# Altium PCB LightLinkV2.PcbDoc (part 2 of 2)
Units mil, origin at the board's own origin, x right, y up, seen from the top; angles counter-clockwise.
Board outline 15795 x 10265 mil, 4 copper layers (Top Layer, VCC, GND, Bottom Layer), stack 23.756 mil thick; 269 components, 206 nets, 809 pads, 14 vias.
Unrouted connection lines stored in the file: 511.
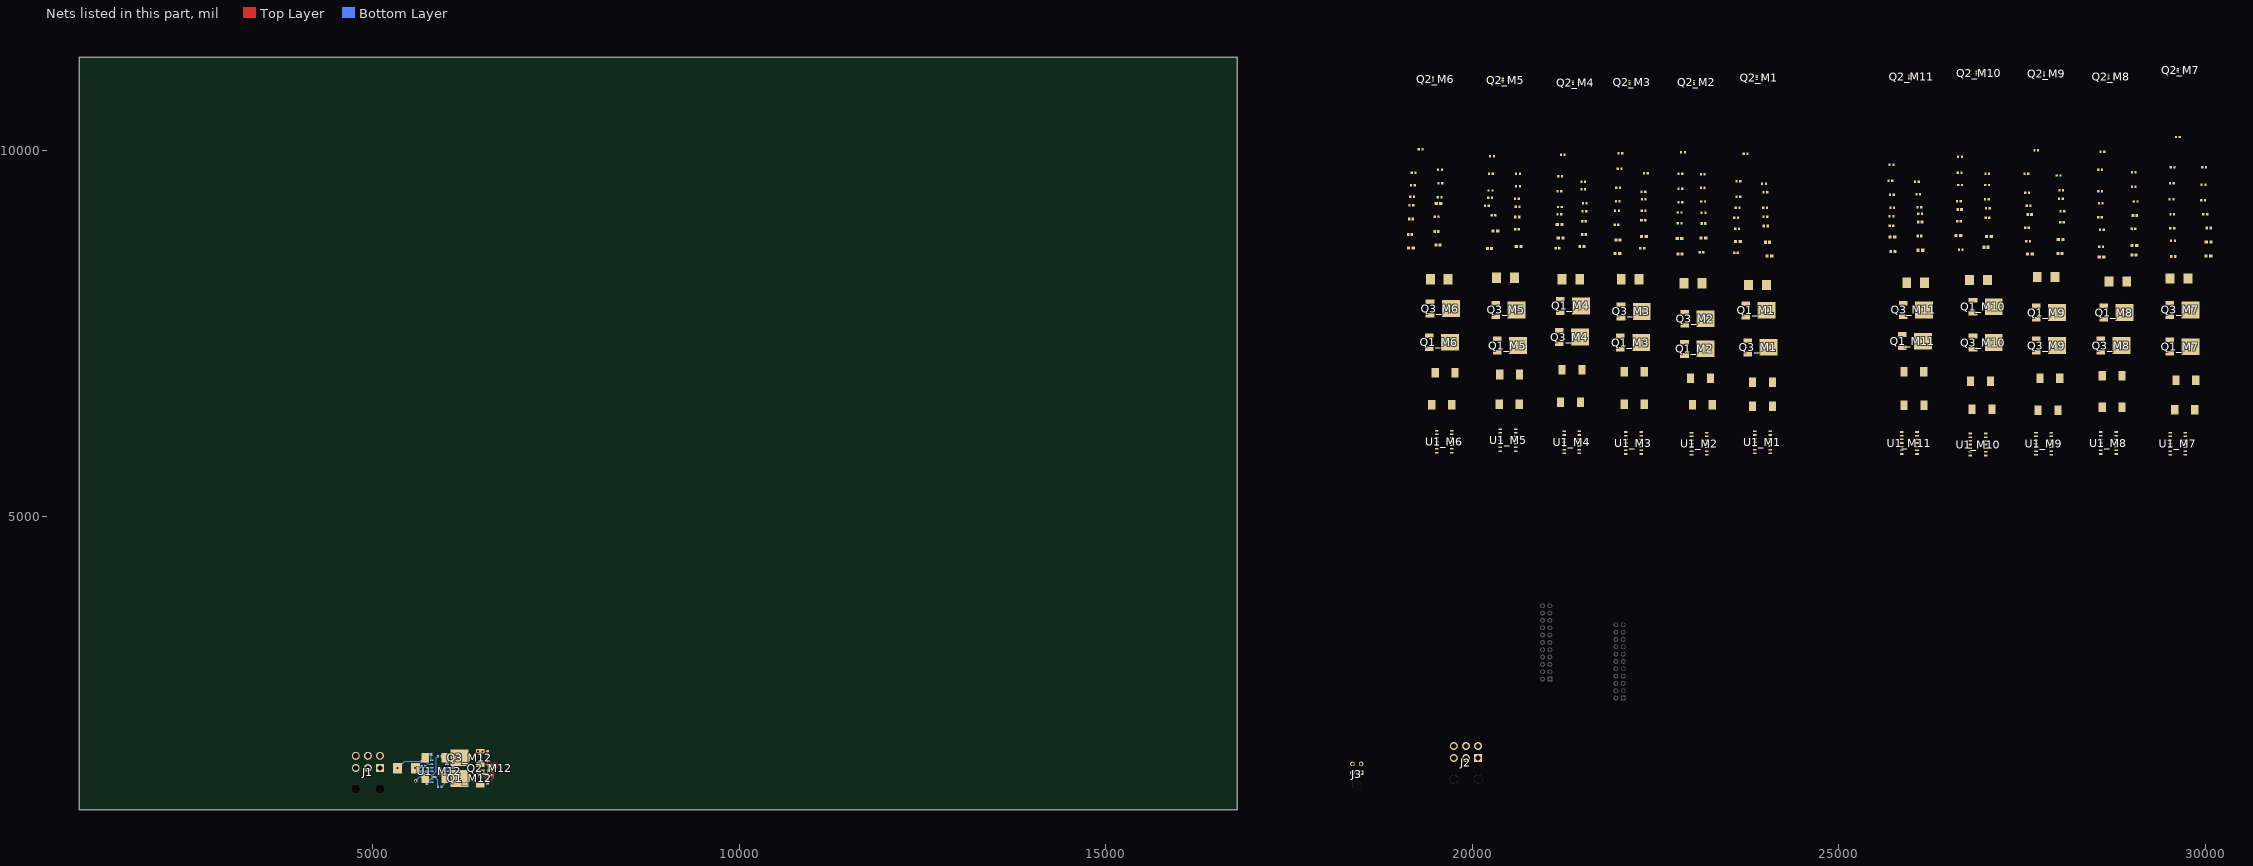
[diagram p4: the nets of this part, all layers, seen from the top]

## Part data
D1_M1 D1_M2 D1_M3 D1_M4 D1_M5 D1_M6 D1_M7 D1_M8 D1_M9 D1_M10 D1_M11 D1_M12 D2_M1 D2_M2 D2_M3 D2_M4 D2_M5 D2_M6 D2_M7 D2_M8 D2_M9 D2_M10 D2_M11 D2_M12: library part CMP-2000-07025-2, "DIODE GEN PURP 100V 5A SMC", Capacitance=40pF, Forward Current=5A, Manufacturer="Diodes Inc.", Max Junction Temp=+150°C, Max Repetitive Reverse Voltage=100V, Max Surge Forward Current=100A, Package=SMC, Peak Reverse Current=10uA, Temperature="-65°C to +150°C", Temperature Range Low=-65°C, Automotive=No, Category=Diode, ComponentLink2Description=Datasheet, ComponentLink2URL=https://www.diodes.com/assets/Datasheets/ds16007.pdf, Device Class L1="Discrete Semiconductors", Device Class L2=Diodes, Device Class L3="Rectifier Diodes", Digikey Description="DIODE GEN PURP 100V 5A SMC", Footprint Url=https://www.diodes.com/assets/Package-Files/SMC.pdf, Height=2.5mm, Lead Free=Yes, Manufacturer Part Number=S5BC-13-F, Mouser Description="Rectifiers 100V 5A", Octopart=https://octopart.com/s5bc-13-f-diodes+inc.-333396, Reverse Voltage=100V, RoHS=TRUE, Standoff Height=0.1mm, Temperature Range High=+150°C
J1 J2: library part CMP-04776-000024-1, "CONN HEADER R/A 6POS 4.2MM", Current Rating=8A, Manufacturer=Molex, Package=0, Temperature="-40°C to +105°C", Temperature Range High=+105°C, Temperature Range Low=-40°C, Voltage Rating=600V, Automotive=No, Category=Conn, ComponentLink2Description=Datasheet, ComponentLink2URL=https://www.molex.com/webdocs/datasheets/pdf/en-us/0455580003_PCB_HEADERS.pdf, Conn Gender=Male, Conn Orientation="Right Angle", Contact Material=Tin,Nickel, Device Class L1=Connectors, Device Class L2="Headers and Wire Housings", Device Class L3=unset, Digikey Description="CONN HEADER R/A 6POS 4.2MM", Footprint Url=https://www.molex.com/pdm_docs/sd/455580003_sd.pdf, Height=10.38mm, Lead Free=Yes, Manufacturer Part Number=455580003, Mouser Description="Conn Power HDR 6 POS 4.2mm Solder ST Thru-Hole 6 Terminal 1 Port Mini-Fit Jr™ Tray", Number Of Contacts=6, Number Of Rows=2, Octopart=https://octopart.com/45558-0003-molex-7672845, Pitch=4.2mm, RoHS=TRUE, Standoff Height=0.4mm
J3: library part CMP-04776-000002-1, "CONN HEADER R/A 4POS 3MM", Current Rating=8.5A, Manufacturer=Molex, Temperature="-40°C to +105°C", Temperature Range High=+105°C, Temperature Range Low=-40°C, Voltage Rating=600V, Automotive=No, Category=Conn, ComponentLink2Description=Datasheet, ComponentLink2URL=https://www.molex.com/webdocs/datasheets/pdf/en-us/0430450400_PCB_HEADERS.pdf, Conn Gender=Male, Conn Orientation="Right Angle", Contact Material=Tin,Nickel, Device Class L1=Connectors, Device Class L2="Headers and Wire Housings", Device Class L3=unset, Digikey Description="CONN HEADER R/A 4POS 3MM", Footprint Url=https://www.molex.com/pdm_docs/sd/430450400_sd.pdf, Height=9.27mm, Is Female=yes, Lead Free=Yes, Manufacturer Part Number=43045-0400, Number Of Contacts=4, Number Of Rows=2, Octopart=https://octopart.com/43045-0400-molex-287063, Package=43045-0400, Pitch=3mm, RoHS=TRUE
J4 J5: library part CMP-1502-01108-1, "THT Vertical Pin Header WR-PHD, Pitch 2.54 mm, Dual Row, 22 pins", Contact Resistance=20mOhm, Manufacturer="Wurth Elektronik", Operating Temperature=-40to105degC, Rated Current=3A, Withstanding Voltage=500VAC, Working Voltage=250VAC, Datasheet URL=https://katalog.we-online.de/em/datasheet/6130xx21121.pdf, Gender=Male, Manufacturer URL=http://www.we-online.de, Mounting Technology=THT, Orientation=Vertical, Package Reference=61302221121, Packaging=Bag, Part Number=61302221121, Pin Number=22, Pitch=2.54mm, Publisher=WurthElektronik, Row Number=Dual
Q1_M1 Q1_M2 Q1_M3 Q1_M4 Q1_M5 Q1_M6 Q1_M7 Q1_M8 Q1_M9 Q1_M10 Q1_M11 Q1_M12 Q3_M1 Q3_M2 Q3_M3 Q3_M4 Q3_M5 Q3_M6 Q3_M7 Q3_M8 Q3_M9 Q3_M10 Q3_M11 Q3_M12: library part CMP-1058-00409-1, "Power MOSFET, -25 A, -30 V, Logic Level P-Channel, 3-Pin DPAK, Pb-Free, Tape and Reel", Manufacturer="On Semiconductor", Package Type=DPAK-3, Channel Polarity="P Channel", Ciss Typ (pF)=900, ComponentLink1Description="Manufacturer URL", ComponentLink1URL=http://www.onsemi.com/, ComponentLink2Description=Datasheet, ComponentLink2URL=http://www.onsemi.cn/pub_link/Collateral/NTD25P03L-D.PDF, ComponentLink3Description="Package Specification", ComponentLink3URL=http://www.onsemi.cn/pub_link/Collateral/369C.PDF, Configuration=Single, Coss Typ (pF)=290, Crss Typ (pF)=105, DatasheetVersion="Rev. 4", ID Max (A)=25, Mounting Technology="Surface Mount", PackageDescription="3-Pin Flange Mount, Body 6.54 x 6.095 mm, Pitch 2.29 mm", PackageReference=DPAK-3-369C-01, PackageVersion="Rev. E, 02/2014", Packing="Tape and Reel", PartNumber=NTD25P03LT4G, PD Max (W)=75, Qrr Typ (nC)=35, RoHS=Pb-Free, V(BR)DSS Min (V)=30, VGS Max (V)=15, VGS(th) Max (V)=2
Q2_M1 Q2_M2 Q2_M3 Q2_M4 Q2_M5 Q2_M6 Q2_M7 Q2_M8 Q2_M9 Q2_M10 Q2_M11 Q2_M12: library part CMP-35916-000009-1, "MOSFET 2N-CH 60V 0.3A", Continuous Drain Current (ID)=300mA, Drain to Source Voltage (Vdss)=60V, Input Capacitance=40pF, Max Power Dissipation=285mW, FET Type="2 N-Channel", Mount="Surface Mount", Packaging="Tape and Reel", Rds On Max=1.5R
R1_M1 R1_M2 R1_M3 R1_M4 R1_M5 R1_M6 R1_M7 R1_M8 R1_M9 R1_M10 R1_M11 R1_M12 R9_M1 R9_M2 R9_M3 R9_M4 R9_M5 R9_M6 R9_M7 R9_M8 R9_M9 R9_M10 R9_M11 R9_M12: library part CMP-2000-03352-2, "RES Thick Film, 43kΩ, 1%, 0.1W, 100ppm/°C, 0603", Case Code (Imperial)=0603, Case Code (Metric)=1608, Max Operating Temperature=155°C, Max Power Dissipation=100mW, Min Operating Temperature=-55°C, Package Quantity=10, Resistance=43kR, Temperature Coefficient=100ppm/°C, Tolerance=1%, Voltage Rating=75V, Case/Package=0603, Composition="Thick Film", Contact Plating=Tin, Depth=0.85mm, Features="Automotive AEC-Q200", Height=0.45mm, Lead Free="Lead Free", Length=1.55mm, Military Standard=Not, Mount="Surface Mount", Number of Pins=2, Number of Terminations=2, Packaging="Tape and Reel", Power Rating=100mW, Radiation Hardening=No, Termination=SMD/SMT, Voltage Rating (DC)=75V, Weight=7.1E-05oz, Width=0.033inch
R2_M1 R2_M2 R2_M3 R2_M4 R2_M5 R2_M6 R2_M7 R2_M8 R2_M9 R2_M10 R2_M11 R2_M12 R5_M1 R5_M2 R5_M3 R5_M4 R5_M5 R5_M6 R5_M7 R5_M8 R5_M9 R5_M10 R5_M11 R5_M12: library part CMP-2000-00873-2, "RES SMD 1K OHM 0.1% 1/10W 0603", Case Code (Imperial)=0603, Case Code (Metric)=1608, Max Operating Temperature=155°C, Max Power Dissipation=100mW, Min Operating Temperature=-55°C, Package Quantity=5000, Resistance=1kR, Resistance Tolerance=0.1%, Resistor Type="Thin Film", Temperature Coefficient=25ppm/°C, Voltage Rating=75V, Case/Package=0603, Construction=Rectangular, Contact Plating=Tin, Depth=0.8mm, Height=0.45mm, Length=1.6mm, Military Standard=Not, Mount="Surface Mount", Number of Pins=2, Number of Terminations=2, Packaging="Tape and Reel", Power Rating=100mW, Radiation Hardening=No, REACH SVHC="No SVHC", RoHS Compliant=Yes, Series=ERA-3A, Size Code=0603, Technology="METAL FILM", Termination=SMD/SMT, Tolerance=0.1%, Width=0.8mm
R3_M1 R3_M2 R3_M3 R3_M4 R3_M5 R3_M6 R3_M7 R3_M8 R3_M9 R3_M10 R3_M11 R3_M12 R4_M1 R4_M2 R4_M3 R4_M4 R4_M5 R4_M6 R4_M7 R4_M8 R4_M9 R4_M10 R4_M11 R4_M12 R6_M1 R6_M2 R6_M3 R6_M4 R6_M5 R6_M6 R6_M7 R6_M8 R6_M9 R6_M10 R6_M11 R6_M12 R7_M1 R7_M2 R7_M3 R7_M4 R7_M5 R7_M6 R7_M7 R7_M8 R7_M9 R7_M10 R7_M11 R7_M12 R10_M1 R10_M2 R10_M3 R10_M4 R10_M5 R10_M6 R10_M7 R10_M8 R10_M9 R10_M10 R10_M11 R10_M12 R11_M1 R11_M2 R11_M3 R11_M4 R11_M5 R11_M6 R11_M7 R11_M8 R11_M9 R11_M10 R11_M11 R11_M12 R13_M1 R13_M2 R13_M3 R13_M4 R13_M5 R13_M6 R13_M7 R13_M8 R13_M9 R13_M10 R13_M11 R13_M12 R15_M1 R15_M2 R15_M3 R15_M4 R15_M5 R15_M6 R15_M7 R15_M8 R15_M9 R15_M10 R15_M11 R15_M12 R16_M1 R16_M2 R16_M3 R16_M4 R16_M5 R16_M6 R16_M7 R16_M8 R16_M9 R16_M10 R16_M11 R16_M12: library part CMP-1012-00623-3, "Chip Resistor, 10 KOhm, +/- 1%, 0.1 W, -55 to 155 degC, 0603 (1608 Metric), RoHS, Tape and Reel", Case Code (Imperial)=0603, Case Code (Metric)=1608, Manufacturer=Panasonic, Max Operating Temperature=155degC, Max Power Dissipation=100mW, Min Operating Temperature=-55degC, Package Description="2-Pin Surface Mount Device, Body 1.6 x 0.85 mm", Package Quantity=1, Package Reference=603, Resistance=10KOhm, Temperature Coefficient=100ppm\/degreesC, Tolerance=1%, Voltage Rating=75V, Case\/Package=0603, Composition=ThickFilm, Contact Plating=Tin, Datasheet URL=https://industrial.panasonic.com/cdbs/www-data/pdf/RDA0000/AOA0000C304.pdf, Datasheet Version=02/2017, Depth=0.8mm, Height=0.45mm, Lead Free=LeadFree, Length=1.6mm, Manufacturer URL=http://www.panasonic.com/, Military Standard=Not, Mount=SurfaceMount, Mounting Technology=SurfaceMount, Number of Pins=2, Number of Terminations=2, Packaging=TapeandReel, Power Rating=100mW, Radiation Hardening=No, REACH SVHC=NoSVHC, RoHSCompliant=true, Termination=SMD/SMT, Voltage Rating (DC)=75V, Width=0.031inch
R8_M1 R8_M2 R8_M3 R8_M4 R8_M5 R8_M6 R8_M7 R8_M8 R8_M9 R8_M10 R8_M11 R8_M12: library part CMP-2000-00122-1, Manufacturer=Panasonic, Part Number=ERA-3AEB751V
R12_M1 R12_M2 R12_M3 R12_M4 R12_M5 R12_M6 R12_M7 R12_M8 R12_M9 R12_M10 R12_M11 R12_M12: library part CMP-2000-00965-1, Manufacturer=Panasonic, Part Number=ERA3AEB242V
R14_M1 R14_M2 R14_M3 R14_M4 R14_M5 R14_M6 R14_M7 R14_M8 R14_M9 R14_M10 R14_M11 R14_M12: library part CMP-33361-000012-1, "RES SMD 10 MOHM 1% 2W 3264", Case Code (Imperial)=2512, Case Code (Metric)=6432, Max Operating Temperature=150°C, Max Power Dissipation=2W, Min Operating Temperature=-55°C, Package Quantity=1, Resistance=10mR, Temperature Coefficient=50ppm/°C, Tolerance=1%, Voltage Rating=220mV, Case/Package=2512, Composition="Metal Element", Depth=3.2mm, Features="Flame Retardant Coating", Height=0.024inch, Length=6.4mm, Military Standard=Not, Mount="Surface Mount", Number of Pins=2, Number of Terminations=2, Packaging="Tape and Reel", Power Rating=2W, Termination=SMD/SMT, Width=0.126inch
U1_M1 U1_M2 U1_M3 U1_M4 U1_M5 U1_M6 U1_M7 U1_M8 U1_M9 U1_M10 U1_M11 U1_M12: library part CMP-2000-06547-1, "Quadruple Operational Amplifier, 0.5 V/us, 1.2 MHz, 3 to 32 V, 0 to 70 degC, 14-Pin SOIC (D), Green (RoHS & no Sb/Br), Tube", Dual Supply Voltage (Max)=±16V, Dual Supply Voltage (Min)=±1.5V, Dual Supply Voltage (Typ)=±3/±5/±9/±12/±15V, Input Bias Current=250nA, Input Offset Voltage=7mV, Manufacturer="Texas Instruments", Operating Temp Range=0Cto70C, Operating Temperature Classification=Commercial, Package Description="14-Pin Small Outline Integrated Circuit, Body 8.65 x 3.9 mm, Pitch 1.27 mm", Package Reference=D0014A, Package Type=SOIC, Power Supply Requirement=Single/Dual, Single Supply Voltage (Max)=32V, Single Supply Voltage (Min)=3V, Single Supply Voltage (Typ)=5/9/12/15/18/24/28V, Voltage Gain in dB=100dB, Common Mode Rejection Ratio=65dB, Datasheet URL=http://www.ti.com/lit/ds/symlink/lm324.pdf, Datasheet Version="Rev. W, 03/2015", Manufacturer URL=http://www.ti.com/, Mounting=SurfaceMount, Mounting Technology=SurfaceMount, Number of  Elements=4, Package URL=http://www.ti.com/lit/ml/mpds177g/mpds177g.pdf, Packaging=Rail/Tube, Pin Count=14, Rail/Rail I/O Type=No, Shut Down Feature=No, Slew Rate=0.5V/us, Technology=Bipolar, Type=GeneralPurposeAmplifier, Unity Gain Bandwidth Product=1.2MHz

## Via types
v1: diameter 50, hole 28, Top Layer to Bottom Layer, 14 vias

## Nets (pads, with @x,y where several pads share a name; then routed paths per layer and width w, separated by ;. In a path a pad name is that pad's centre, name@x,y a point inside that pad or via, vN(x,y) a via of type N, cw(c..) or ccw(c..) an arc to the next point about the centre after c; other vN are vias at no path point)
CUR_SENSE_1: R1_M12.2 U1_M12.14 | length 86.7
  Bottom Layer w12: R1_M12.2@5797.1,1755 5797.1,1679.83 5801.93,1675 U1_M12.14@5806.65,1675
CUR_SENSE_2: R1_M11.2 U1_M11.14
CUR_SENSE_3: R1_M10.2 U1_M10.14
CUR_SENSE_4: R1_M9.2 U1_M9.14
CUR_SENSE_5: R1_M8.2 U1_M8.14
CUR_SENSE_6: R1_M7.2 U1_M7.14
CUR_SENSE_7: R1_M6.2 U1_M6.14
CUR_SENSE_8: R1_M5.2 U1_M5.14
CUR_SENSE_9: R1_M4.2 U1_M4.14
CUR_SENSE_10: R1_M3.2 U1_M3.14
CUR_SENSE_11: R1_M2.2 U1_M2.14
CUR_SENSE_12: R1_M1.2 U1_M1.14
GND: J3.3 J3.4 Q2_M1.1 Q2_M1.4 Q2_M2.1 Q2_M2.4 Q2_M3.1 Q2_M3.4 Q2_M4.1 Q2_M4.4 Q2_M5.1 Q2_M5.4 Q2_M6.1 Q2_M6.4 Q2_M7.1 Q2_M7.4 Q2_M8.1 Q2_M8.4 Q2_M9.1 Q2_M9.4 Q2_M10.1 Q2_M10.4 Q2_M11.1 Q2_M11.4 Q2_M12.1 Q2_M12.4 R4_M1.1 R4_M2.1 R4_M3.1 R4_M4.1 R4_M5.1 R4_M6.1 R4_M7.1 R4_M8.1 R4_M9.1 R4_M10.1 R4_M11.1 R4_M12.1 R8_M1.1 R8_M2.1 R8_M3.1 R8_M4.1 R8_M5.1 R8_M6.1 R8_M7.1 R8_M8.1 R8_M9.1 R8_M10.1 R8_M11.1 R8_M12.1 R9_M1.1 R9_M2.1 R9_M3.1 R9_M4.1 R9_M5.1 R9_M6.1 R9_M7.1 R9_M8.1 R9_M9.1 R9_M10.1 R9_M11.1 R9_M12.1 R12_M1.1 R12_M2.1 R12_M3.1 R12_M4.1 R12_M5.1 R12_M6.1 R12_M7.1 R12_M8.1 R12_M9.1 R12_M10.1 R12_M11.1 R12_M12.1 R15_M1.2 R15_M2.2 R15_M3.2 R15_M4.2 R15_M5.2 R15_M6.2 R15_M7.2 R15_M8.2 R15_M9.2 R15_M10.2 R15_M11.2 R15_M12.2 U1_M1.11 U1_M2.11 U1_M3.11 U1_M4.11 U1_M5.11 U1_M6.11 U1_M7.11 U1_M8.11 U1_M9.11 U1_M10.11 U1_M11.11 U1_M12.11 | length 775.3
  Top Layer w12: R15_M12.2@6569.41,1475 Q2_M12.4@6569.41,1532.6 6569.41,1540.47 6577.13,1548.19 6577.13,1552.49 6594.64,1570 6595.36,1570 6618.72,1593.35 6618.72,1605.53 Q2_M12.1@6620.59,1607.4 6621.29,1606.7 6662.3,1606.7 v1(6663,1606)
  Bottom Layer w12: v1(5586,1397) 5639,1450 R4_M12.1@5689.41,1450 5689.41,1477.31 5711.76,1499.66 5711.76,1501.09 5730.67,1520 R9_M12.1@5732.1,1520 5737.1,1525 U1_M12.11@5806.65,1525 ; v1(5900,1485) 5910.28,1485 5925.28,1500 6077.32,1500 6084.35,1507.03 6084.35,1508.76 6098.03,1522.44 R8_M12.1@6100,1522.44 6101.97,1522.44 6121.72,1502.69 6121.72,1473.87 R12_M12.1@6130.59,1465
NetQ1_M1_1: Q1_M1.1 Q2_M1.6 R13_M1.1
NetQ1_M2_1: Q1_M2.1 Q2_M2.6 R13_M2.1
NetQ1_M3_1: Q1_M3.1 Q2_M3.6 R13_M3.1
NetQ1_M4_1: Q1_M4.1 Q2_M4.6 R13_M4.1
NetQ1_M5_1: Q1_M5.1 Q2_M5.6 R13_M5.1
NetQ1_M6_1: Q1_M6.1 Q2_M6.6 R13_M6.1
NetQ1_M7_1: Q1_M7.1 Q2_M7.6 R13_M7.1
NetQ1_M8_1: Q1_M8.1 Q2_M8.6 R13_M8.1
NetQ1_M9_1: Q1_M9.1 Q2_M9.6 R13_M9.1
NetQ1_M10_1: Q1_M10.1 Q2_M10.6 R13_M10.1
NetQ1_M11_1: Q1_M11.1 Q2_M11.6 R13_M11.1
NetQ1_M12_1: Q1_M12.1 Q2_M12.6 R13_M12.1 | length 333.3
  Top Layer w12: Q1_M12.1@6468.23,1339.84 6487.8,1359.41 R13_M12.1@6570,1359.41 6571.97,1359.41 6649,1436.44 6649,1504.19 6630.34,1522.85 6622.46,1522.85 6620.59,1524.72 Q2_M12.6@6620.59,1532.6
NetQ2_M1_3: Q2_M1.3 Q3_M1.1 R16_M1.1
NetQ2_M2_3: Q2_M2.3 Q3_M2.1 R16_M2.1
NetQ2_M3_3: Q2_M3.3 Q3_M3.1 R16_M3.1
NetQ2_M4_3: Q2_M4.3 Q3_M4.1 R16_M4.1
NetQ2_M5_3: Q2_M5.3 Q3_M5.1 R16_M5.1
NetQ2_M6_3: Q2_M6.3 Q3_M6.1 R16_M6.1
NetQ2_M7_3: Q2_M7.3 Q3_M7.1 R16_M7.1
NetQ2_M8_3: Q2_M8.3 Q3_M8.1 R16_M8.1
NetQ2_M9_3: Q2_M9.3 Q3_M9.1 R16_M9.1
NetQ2_M10_3: Q2_M10.3 Q3_M10.1 R16_M10.1
NetQ2_M11_3: Q2_M11.3 Q3_M11.1 R16_M11.1
NetQ2_M12_3: Q2_M12.3 Q3_M12.1 R16_M12.1 | length 244
  Top Layer w12: Q3_M12.1@6468.23,1619.84 6564.84,1619.84 Q2_M12.3@6569.2,1615.48 ; R16_M12.1@6569,1748.41 6569.2,1748.2 Q2_M12.3@6569.2,1615.48 ; Q2_M12.3@6569.41,1607.4 6569.41,1615.28 Q2_M12.3@6569.2,1615.48
NetR1_M1_1: R1_M1.1 R2_M1.2 U1_M1.13
NetR1_M2_1: R1_M2.1 R2_M2.2 U1_M2.13
NetR1_M3_1: R1_M3.1 R2_M3.2 U1_M3.13
NetR1_M4_1: R1_M4.1 R2_M4.2 U1_M4.13
NetR1_M5_1: R1_M5.1 R2_M5.2 U1_M5.13
NetR1_M6_1: R1_M6.1 R2_M6.2 U1_M6.13
NetR1_M7_1: R1_M7.1 R2_M7.2 U1_M7.13
NetR1_M8_1: R1_M8.1 R2_M8.2 U1_M8.13
NetR1_M9_1: R1_M9.1 R2_M9.2 U1_M9.13
NetR1_M10_1: R1_M10.1 R2_M10.2 U1_M10.13
NetR1_M11_1: R1_M11.1 R2_M11.2 U1_M11.13
NetR1_M12_1: R1_M12.1 R2_M12.2 U1_M12.13 | length 199.7
  Bottom Layer w12: R1_M12.1@5732.9,1755 5719.63,1741.73 R2_M12.2@5719.63,1665 5719.63,1663.99 5758.62,1625 U1_M12.13@5806.65,1625
NetR3_M1_1: R3_M1.1 R8_M1.2 U1_M1.3
NetR3_M2_1: R3_M2.1 R8_M2.2 U1_M2.3
NetR3_M3_1: R3_M3.1 R8_M3.2 U1_M3.3
NetR3_M4_1: R3_M4.1 R8_M4.2 U1_M4.3
NetR3_M5_1: R3_M5.1 R8_M5.2 U1_M5.3
NetR3_M6_1: R3_M6.1 R8_M6.2 U1_M6.3
NetR3_M7_1: R3_M7.1 R8_M7.2 U1_M7.3
NetR3_M8_1: R3_M8.1 R8_M8.2 U1_M8.3
NetR3_M9_1: R3_M9.1 R8_M9.2 U1_M9.3
NetR3_M10_1: R3_M10.1 R8_M10.2 U1_M10.3
NetR3_M11_1: R3_M11.1 R8_M11.2 U1_M11.3
NetR3_M12_1: R3_M12.1 R8_M12.2 U1_M12.3 | length 144.6
  Bottom Layer w12: U1_M12.3@6013.35,1575 6097.44,1575 R8_M12.2@6100,1577.56 R3_M12.1@6100,1634.41
NetR4_M1_2: R4_M1.2 R7_M1.2 U1_M1.9
NetR4_M2_2: R4_M2.2 R7_M2.2 U1_M2.9
NetR4_M3_2: R4_M3.2 R7_M3.2 U1_M3.9
NetR4_M4_2: R4_M4.2 R7_M4.2 U1_M4.9
NetR4_M5_2: R4_M5.2 R7_M5.2 U1_M5.9
NetR4_M6_2: R4_M6.2 R7_M6.2 U1_M6.9
NetR4_M7_2: R4_M7.2 R7_M7.2 U1_M7.9
NetR4_M8_2: R4_M8.2 R7_M8.2 U1_M8.9
NetR4_M9_2: R4_M9.2 R7_M9.2 U1_M9.9
NetR4_M10_2: R4_M10.2 R7_M10.2 U1_M10.9
NetR4_M11_2: R4_M11.2 R7_M11.2 U1_M11.9
NetR4_M12_2: R4_M12.2 R7_M12.2 U1_M12.9 | length 120.1
  Bottom Layer w12: R4_M12.2@5740.59,1450 5740.3,1449.7 5740.3,1405.89 R7_M12.2@5740,1405.59 5774.73,1405.59 5788.05,1418.91 5788.05,1420.17 5792.87,1425 U1_M12.9@5806.65,1425
NetR5_M1_2: R5_M1.2 R9_M1.2 U1_M1.12
NetR5_M2_2: R5_M2.2 R9_M2.2 U1_M2.12
NetR5_M3_2: R5_M3.2 R9_M3.2 U1_M3.12
NetR5_M4_2: R5_M4.2 R9_M4.2 U1_M4.12
NetR5_M5_2: R5_M5.2 R9_M5.2 U1_M5.12
NetR5_M6_2: R5_M6.2 R9_M6.2 U1_M6.12
NetR5_M7_2: R5_M7.2 R9_M7.2 U1_M7.12
NetR5_M8_2: R5_M8.2 R9_M8.2 U1_M8.12
NetR5_M9_2: R5_M9.2 R9_M9.2 U1_M9.12
NetR5_M10_2: R5_M10.2 R9_M10.2 U1_M10.12
NetR5_M11_2: R5_M11.2 R9_M11.2 U1_M11.12
NetR5_M12_2: R5_M12.2 R9_M12.2 U1_M12.12 | length 191.9
  Bottom Layer w12: R9_M12.2@5667.9,1520 5669.33,1520 5684.24,1534.91 5684.24,1558.23 R5_M12.2@5720,1593.99 ; R5_M12.2@5720,1595 R5_M12.2@5720,1593.99 ; U1_M12.12@5806.65,1575 5738.99,1575 R5_M12.2@5720,1593.99
NetR6_M1_1: R6_M1.1 R11_M1.1 U1_M1.10
NetR6_M1_2: R6_M1.2 U1_M1.1 U1_M1.2
NetR6_M2_1: R6_M2.1 R11_M2.1 U1_M2.10
NetR6_M2_2: R6_M2.2 U1_M2.1 U1_M2.2
NetR6_M3_1: R6_M3.1 R11_M3.1 U1_M3.10
NetR6_M3_2: R6_M3.2 U1_M3.1 U1_M3.2
NetR6_M4_1: R6_M4.1 R11_M4.1 U1_M4.10
NetR6_M4_2: R6_M4.2 U1_M4.1 U1_M4.2
NetR6_M5_1: R6_M5.1 R11_M5.1 U1_M5.10
NetR6_M5_2: R6_M5.2 U1_M5.1 U1_M5.2
NetR6_M6_1: R6_M6.1 R11_M6.1 U1_M6.10
NetR6_M6_2: R6_M6.2 U1_M6.1 U1_M6.2
NetR6_M7_1: R6_M7.1 R11_M7.1 U1_M7.10
NetR6_M7_2: R6_M7.2 U1_M7.1 U1_M7.2
NetR6_M8_1: R6_M8.1 R11_M8.1 U1_M8.10
NetR6_M8_2: R6_M8.2 U1_M8.1 U1_M8.2
NetR6_M9_1: R6_M9.1 R11_M9.1 U1_M9.10
NetR6_M9_2: R6_M9.2 U1_M9.1 U1_M9.2
NetR6_M10_1: R6_M10.1 R11_M10.1 U1_M10.10
NetR6_M10_2: R6_M10.2 U1_M10.1 U1_M10.2
NetR6_M11_1: R6_M11.1 R11_M11.1 U1_M11.10
NetR6_M11_2: R6_M11.2 U1_M11.1 U1_M11.2
NetR6_M12_1: R6_M12.1 R11_M12.1 U1_M12.10 | length 492.1
  Bottom Layer w12: U1_M12.10@5806.65,1475 U1_M12.10@5820.43,1475 ; R11_M12.1@5889.41,1315 5889.41,1406.02 U1_M12.10@5820.43,1475 ; R6_M12.1@5889.41,1735 5889.41,1733.03 5880.65,1724.27 5878.68,1724.27 5870,1715.59 5870,1524.57 U1_M12.10@5820.43,1475
NetR6_M12_2: R6_M12.2 U1_M12.1 U1_M12.2 | length 148.8
  Bottom Layer w12: R6_M12.2@5940.59,1735 5940.59,1733.03 5949.35,1724.27 5950.3,1724.27 5999.57,1675 U1_M12.1@6013.35,1675 U1_M12.2@6013.35,1625
NetR10_M1_1: R10_M1.1 R12_M1.2 U1_M1.5
NetR10_M2_1: R10_M2.1 R12_M2.2 U1_M2.5
NetR10_M3_1: R10_M3.1 R12_M3.2 U1_M3.5
NetR10_M4_1: R10_M4.1 R12_M4.2 U1_M4.5
NetR10_M5_1: R10_M5.1 R12_M5.2 U1_M5.5
NetR10_M6_1: R10_M6.1 R12_M6.2 U1_M6.5
NetR10_M7_1: R10_M7.1 R12_M7.2 U1_M7.5
NetR10_M8_1: R10_M8.1 R12_M8.2 U1_M8.5
NetR10_M9_1: R10_M9.1 R12_M9.2 U1_M9.5
NetR10_M10_1: R10_M10.1 R12_M10.2 U1_M10.5
NetR10_M11_1: R10_M11.1 R12_M11.2 U1_M11.5
NetR10_M12_1: R10_M12.1 R12_M12.2 U1_M12.5 | length 120.4
  Bottom Layer w12: U1_M12.5@6013.35,1475 6069.41,1475 R12_M12.2@6079.41,1465 6079.7,1464.7 6079.7,1415.3 R10_M12.1@6080,1415
NetR11_M1_2: R11_M1.2 U1_M1.6 U1_M1.7
NetR11_M2_2: R11_M2.2 U1_M2.6 U1_M2.7
NetR11_M3_2: R11_M3.2 U1_M3.6 U1_M3.7
NetR11_M4_2: R11_M4.2 U1_M4.6 U1_M4.7
NetR11_M5_2: R11_M5.2 U1_M5.6 U1_M5.7
NetR11_M6_2: R11_M6.2 U1_M6.6 U1_M6.7
NetR11_M7_2: R11_M7.2 U1_M7.6 U1_M7.7
NetR11_M8_2: R11_M8.2 U1_M8.6 U1_M8.7
NetR11_M9_2: R11_M9.2 U1_M9.6 U1_M9.7
NetR11_M10_2: R11_M10.2 U1_M10.6 U1_M10.7
NetR11_M11_2: R11_M11.2 U1_M11.6 U1_M11.7
NetR11_M12_2: R11_M12.2 U1_M12.6 U1_M12.7 | length 148.8
  Bottom Layer w12: R11_M12.2@5940.59,1315 5940.59,1316.97 5949.35,1325.73 5950.3,1325.73 5999.57,1375 U1_M12.7@6013.35,1375 U1_M12.6@6013.35,1425
OUT_1: J1.1 R2_M12.1 R14_M12.2 | length 369.7
  Bottom Layer w12: v1(5340,1570) 5435,1665 R2_M12.1@5670.37,1665
OUT_2: J1.2 R2_M11.1 R14_M11.2
OUT_3: J1.3 R2_M10.1 R14_M10.2
OUT_4: J1.4 R2_M9.1 R14_M9.2
OUT_5: J1.5 R2_M8.1 R14_M8.2
OUT_6: J1.6 R2_M7.1 R14_M7.2
OUT_7: J2.1 R2_M6.1 R14_M6.2
OUT_8: J2.2 R2_M5.1 R14_M5.2
OUT_9: J2.3 R2_M4.1 R14_M4.2
OUT_10: J2.4 R2_M3.1 R14_M3.2
OUT_11: J2.5 R2_M2.1 R14_M2.2
OUT_12: J2.6 R2_M1.1 R14_M1.2
SENSE_1: R7_M12.1 U1_M12.8 | length 75.2
  Bottom Layer w12: R7_M12.1@5740,1354.41 5741.97,1354.41 5762.56,1375 U1_M12.8@5806.65,1375
SENSE_1_M1: D1_M1.2 Q1_M1.4 R10_M1.2
SENSE_1_M2: D1_M2.2 Q1_M2.4 R10_M2.2
SENSE_1_M3: D1_M3.2 Q1_M3.4 R10_M3.2
SENSE_1_M4: D1_M4.2 Q1_M4.4 R10_M4.2
SENSE_1_M5: D1_M5.2 Q1_M5.4 R10_M5.2
SENSE_1_M6: D1_M6.2 Q1_M6.4 R10_M6.2
SENSE_1_M7: D1_M7.2 Q1_M7.4 R10_M7.2
SENSE_1_M8: D1_M8.2 Q1_M8.4 R10_M8.2
SENSE_1_M9: D1_M9.2 Q1_M9.4 R10_M9.2
SENSE_1_M10: D1_M10.2 Q1_M10.4 R10_M10.2
SENSE_1_M11: D1_M11.2 Q1_M11.4 R10_M11.2
SENSE_1_M12: D1_M12.2 Q1_M12.4 R10_M12.2 | length 60
  Bottom Layer w12: R10_M12.2@6131.18,1415 6160.42,1415 6175.42,1430 v1(6185,1430)
SENSE_2: R7_M11.1 U1_M11.8
SENSE_2_M1: D2_M1.2 Q3_M1.4 R3_M1.2
SENSE_2_M2: D2_M2.2 Q3_M2.4 R3_M2.2
SENSE_2_M3: D2_M3.2 Q3_M3.4 R3_M3.2
SENSE_2_M4: D2_M4.2 Q3_M4.4 R3_M4.2
SENSE_2_M5: D2_M5.2 Q3_M5.4 R3_M5.2
SENSE_2_M6: D2_M6.2 Q3_M6.4 R3_M6.2
SENSE_2_M7: D2_M7.2 Q3_M7.4 R3_M7.2
SENSE_2_M8: D2_M8.2 Q3_M8.4 R3_M8.2
SENSE_2_M9: D2_M9.2 Q3_M9.4 R3_M9.2
SENSE_2_M10: D2_M10.2 Q3_M10.4 R3_M10.2
SENSE_2_M11: D2_M11.2 Q3_M11.4 R3_M11.2
SENSE_2_M12: D2_M12.2 Q3_M12.4 R3_M12.2 | length 97.2
  Bottom Layer w12: R3_M12.2@6100,1685.59 6153.6,1685.59 6183.01,1715 v1(6185,1715)
SENSE_3: R7_M10.1 U1_M10.8
SENSE_4: R7_M9.1 U1_M9.8
SENSE_5: R7_M8.1 U1_M8.8
SENSE_6: R7_M7.1 U1_M7.8
SENSE_7: R7_M6.1 U1_M6.8
SENSE_8: R7_M5.1 U1_M5.8
SENSE_9: R7_M4.1 U1_M4.8
SENSE_10: R7_M3.1 U1_M3.8
SENSE_11: R7_M2.1 U1_M2.8
SENSE_12: R7_M1.1 U1_M1.8
SHUNT+_M1: D1_M1.1 D2_M1.1 R5_M1.1 R14_M1.1
SHUNT+_M2: D1_M2.1 D2_M2.1 R5_M2.1 R14_M2.1
SHUNT+_M3: D1_M3.1 D2_M3.1 R5_M3.1 R14_M3.1
SHUNT+_M4: D1_M4.1 D2_M4.1 R5_M4.1 R14_M4.1
SHUNT+_M5: D1_M5.1 D2_M5.1 R5_M5.1 R14_M5.1
SHUNT+_M6: D1_M6.1 D2_M6.1 R5_M6.1 R14_M6.1
SHUNT+_M7: D1_M7.1 D2_M7.1 R5_M7.1 R14_M7.1
SHUNT+_M8: D1_M8.1 D2_M8.1 R5_M8.1 R14_M8.1
SHUNT+_M9: D1_M9.1 D2_M9.1 R5_M9.1 R14_M9.1
SHUNT+_M10: D1_M10.1 D2_M10.1 R5_M10.1 R14_M10.1
SHUNT+_M11: D1_M11.1 D2_M11.1 R5_M11.1 R14_M11.1
SHUNT+_M12: D1_M12.1 D2_M12.1 R5_M12.1 R14_M12.1 | length 101.7
  Bottom Layer w12: v1(5580,1570) 5645.74,1570 5658.9,1583.16 5659.91,1583.16 5670.74,1593.99 R5_M12.1@5670.74,1595
TRIG_1: Q2_M12.2 Q2_M12.5 R15_M12.1 | length 368.7
  Top Layer w12: Q2_M12.2@6595,1607.4 6596.87,1609.28 6596.87,1621.45 6617.42,1642 6677.91,1642 6699,1620.91 6699,1591.09 6677.91,1570 6620.23,1570 6596.87,1546.65 6596.87,1534.47 Q2_M12.5@6595,1532.6 6595,1500.59 6609.86,1485.73 6611.83,1485.73 6620.59,1476.97 R15_M12.1@6620.59,1475
TRIG_2: Q2_M11.2 Q2_M11.5 R15_M11.1
TRIG_3: Q2_M10.2 Q2_M10.5 R15_M10.1
TRIG_4: Q2_M9.2 Q2_M9.5 R15_M9.1
TRIG_5: Q2_M8.2 Q2_M8.5 R15_M8.1
TRIG_6: Q2_M7.2 Q2_M7.5 R15_M7.1
TRIG_7: Q2_M6.2 Q2_M6.5 R15_M6.1
TRIG_8: Q2_M5.2 Q2_M5.5 R15_M5.1
TRIG_9: Q2_M4.2 Q2_M4.5 R15_M4.1
TRIG_10: Q2_M3.2 Q2_M3.5 R15_M3.1
TRIG_11: Q2_M2.2 Q2_M2.5 R15_M2.1
TRIG_12: Q2_M1.2 Q2_M1.5 R15_M1.1
VCC: J3.1 J3.2 Q1_M1.3 Q1_M2.3 Q1_M3.3 Q1_M4.3 Q1_M5.3 Q1_M6.3 Q1_M7.3 Q1_M8.3 Q1_M9.3 Q1_M10.3 Q1_M11.3 Q1_M12.3 Q3_M1.3 Q3_M2.3 Q3_M3.3 Q3_M4.3 Q3_M5.3 Q3_M6.3 Q3_M7.3 Q3_M8.3 Q3_M9.3 Q3_M10.3 Q3_M11.3 Q3_M12.3 R13_M1.2 R13_M2.2 R13_M3.2 R13_M4.2 R13_M5.2 R13_M6.2 R13_M7.2 R13_M8.2 R13_M9.2 R13_M10.2 R13_M11.2 R13_M12.2 R16_M1.2 R16_M2.2 R16_M3.2 R16_M4.2 R16_M5.2 R16_M6.2 R16_M7.2 R16_M8.2 R16_M9.2 R16_M10.2 R16_M11.2 R16_M12.2 U1_M1.4 U1_M2.4 U1_M3.4 U1_M4.4 U1_M5.4 U1_M6.4 U1_M7.4 U1_M8.4 U1_M9.4 U1_M10.4 U1_M11.4 U1_M12.4 | length 386.6
  Top Layer w12: Q1_M12.3@6468.23,1520.16 v1(6495.79,1520.16) 6521.28,1494.66 6521.28,1457.34 6568.03,1410.59 R13_M12.2@6570,1410.59 ; Q3_M12.3@6468.23,1800.16 Q3_M12.3@6495.84,1800.16 ; v1(6497,1799) Q3_M12.3@6495.84,1800.16 ; R16_M12.2@6569,1799.59 6496.41,1799.59 Q3_M12.3@6495.84,1800.16
  Bottom Layer w12: v1(5915,1565) 5955,1525 U1_M12.4@6013.35,1525
  other v1: 6466,1458 6437,1521 6466,1739 6438,1800
pads on no net: J1. J2. J3. J4.1 J4.2 J4.3 J4.4 J4.5 J4.6 J4.7 J4.8 J4.9 J4.10 J4.11 J4.12 J4.13 J4.14 J4.15 J4.16 J4.17 J4.18 J4.19 J4.20 J4.21 J4.22 J5.1 J5.2 J5.3 J5.4 J5.5 J5.6 J5.7 J5.8 J5.9 J5.10 J5.11 J5.12 J5.13 J5.14 J5.15 J5.16 J5.17 J5.18 J5.19 J5.20 J5.21 J5.22

## Polygon pours and split planes (outlines as drawn)
VCC on Top Layer "VCC_L01_P004" (solid, pour order 4): 6406,1834 6534,1834 6534,1769.68 6483,1710 6449,1710 6406,1766
VCC on Top Layer "VCC_L01_P003" (solid, pour order 3): 6406,1554 6534,1554 6534,1489.68 6483,1430 6449,1430 6406,1486
SENSE_2_M12 on Top Layer "SENSE_2_M12_L01_P002" (solid, pour order 2): 5941,1774 6059,1826 6310,1826 6310,1592 6059,1592 5941,1644
SENSE_1_M12 on Top Layer "SENSE_1_M12_L01_P001" (solid, pour order 1): 5941,1495 6059,1547 6310,1547 6310,1313 6059,1313 5941,1365
SHUNT+_M12 on Top Layer "SHUNT+_M12_L01_P000" (solid, pour order 0): 5521,1500 5521,1640 5534,1640 5669,1775 5768,1775 5768,1365 5669,1365
VCC on VCC (split plane): 16774.9,1020.1 1020.1,1020.1 1020.1,11244.9 16774.9,11244.9
GND on GND (split plane): 16774.9,1020.1 1020.1,1020.1 1020.1,11244.9 16774.9,11244.9

## Text inside footprints (layer, text, board x,y; h text height)
J4: Top Overlay "22" at 20974.57,3853.11 h40 r90; Top Overlay "21" at 21080.87,3853.11 h40 r90; Top Overlay "2" at 20974.57,2689.33 h40 r90; Top Overlay "1" at 21080.87,2701.14 h40 r90
J5: Top Overlay "22" at 21974.57,3593.11 h40 r90; Top Overlay "21" at 22080.87,3593.11 h40 r90; Top Overlay "2" at 21974.57,2429.33 h40 r90; Top Overlay "1" at 22080.87,2441.14 h40 r90